# EAGLE board XBEE_NFC_shield_v0_2 (EAGLE 7.1.0)
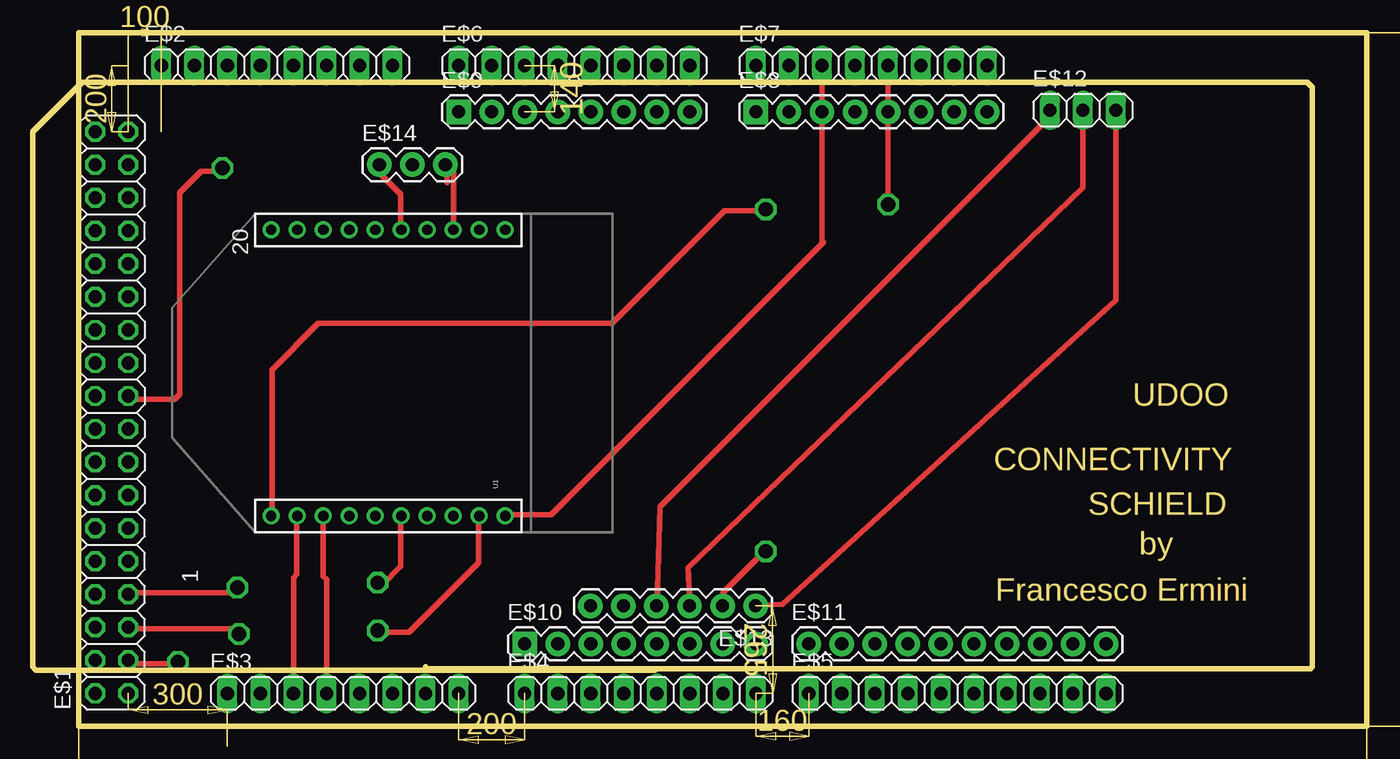
[diagram p0: board, top side]

Size 102.62 x 53.34 mm. Coordinates in mm from the lower left corner, seen from the top.
Outline: 30.23,4.57 30.35,4.45 98.3,4.45 98.42,4.57 98.42,49.15 98.04,49.53 3.81,49.53 0,45.72 0,4.57 0.25,4.32 47.88,4.32
Outline: 102.62,0 3.56,0 3.56,53.34 102.62,53.34 102.62,0
Copper layers (1*16): Top 0.035mm / dielectric 1.5mm / Bottom 0.035mm
Design rules "default": minimum track width 10mil, minimum drill 24mil, track to track 8mil, track to pad 8mil, pad to pad 8mil, via to via 8mil, smd to smd 8mil, copper to edge 40mil, drill to drill 8mil, minimum pad ring 10mil, minimum via ring 8mil, stop-mask expansion 4mil, vias tented up to drill 0mil, thermal gap 10mil
Net classes: 0 default: width 0.254 mm
Milling: area 5.8,45.7 to 6.4,47.2; area 5.8,49.3 to 6.4,50.8; area 4,46.3 to 5.7,50.2; area 7.4,53 to 8.9,53.6; area 8.4,53 to 9.9,53.6; area 6.7,53.7 to 10.6,55.4; area 7.4,1 to 8.9,1.6; area 13.5,1 to 15,1.6; area 9.2,1.7 to 13.1,3.3; area 32.8,-1.3 to 34.3,-0.7; area 36.3,-1.3 to 37.8,-0.7; area 33.3,-0.6 to 37.3,1.1; 15 more areas; 27 lines

## Footprints (pad centres in the part's own frame; a part is rotated, then mirrored left to right if it is on the bottom)
2X18 = drill 1.016 octagon: 1 -21.59,-1.27; 2 -21.59,1.27; 3 -19.05,-1.27; 4 -19.05,1.27; 5 -16.51,-1.27; 6 -16.51,1.27; 7 -13.97,-1.27; 8 -13.97,1.27; 9 -11.43,-1.27; 10 -11.43,1.27; 11 -8.89,-1.27; 12 -8.89,1.27; 13 -6.35,-1.27; 14 -6.35,1.27; 15 -3.81,-1.27; 16 -3.81,1.27; 17 -1.27,-1.27; 18 -1.27,1.27; 19 1.27,-1.27; 20 1.27,1.27; 21 3.81,-1.27; 22 3.81,1.27; 23 6.35,-1.27; 24 6.35,1.27; 25 8.89,-1.27; 26 8.89,1.27; 27 11.43,-1.27; 28 11.43,1.27; 29 13.97,-1.27; 30 13.97,1.27; 31 16.51,-1.27; 32 16.51,1.27; 33 19.05,-1.27; 34 19.05,1.27; 35 21.59,-1.27; 36 21.59,1.27
1X08 = drill 1.016 long: 1 -8.89,0; 2 -6.35,0; 3 -3.81,0; 4 -1.27,0; 5 1.27,0; 6 3.81,0; 7 6.35,0; 8 8.89,0
1X10 = drill 1.016 long: 1 -11.43,0; 2 -8.89,0; 3 -6.35,0; 4 -3.81,0; 5 -1.27,0; 6 1.27,0; 7 3.81,0; 8 6.35,0; 9 8.89,0; 10 11.43,0
1X08' = drill 1.016 pad 1.88 square: 1 0,0 | drill 1.016 pad 1.88: 2 2.54,0; 3 5.08,0; 4 7.62,0; 5 10.16,0; 6 12.7,0; 7 15.24,0; 8 17.78,0
1X10' = drill 1.016 pad 1.88: 1 0,0; 2 2.54,0; 3 5.08,0; 4 7.62,0; 5 10.16,0; 6 12.7,0; 7 15.24,0; 8 17.78,0; 9 20.32,0; 10 22.86,0
1X03 = drill 1.016 long: 1 -2.54,0; 2 0,0; 3 2.54,0
1X06 = drill 1.016 pad 1.88: 1 0,0; 2 2.54,0; 3 5.08,0; 4 7.62,0; 5 10.16,0; 6 12.7,0
1X03' = drill 1.016 pad 1.88: 1 0,0; 2 2.54,0; 3 5.08,0
XBEE-1 = drill 0.8: 1 -11,20; 2 -11,18; 3 -11,16; 4 -11,14; 5 -11,12; 6 -11,10; 7 -11,8; 8 -11,6; 9 -11,4; 10 -11,2; 11 11,2; 12 11,4; 13 11,6; 14 11,8; 15 11,10; 16 11,12; 17 11,14; 18 11,16; 19 11,18; 20 11,20

## Placement (x,y rotation side)
E$1  [2X18]  6.1,24.13 90 top
E$2  [1X08]  18.8,50.8 0 top
E$3  [1X08]  23.88,2.54 0 top
E$4  [1X08]  46.74,2.54 0 top
E$5  [1X10]  71.12,2.54 0 top
E$6  [1X08]  41.66,50.8 0 top
E$7  [1X08]  64.52,50.8 0 top
E$8  [1X08']  55.63,47.24 0 top
E$9  [1X08']  32.77,47.24 0 top
E$10  [1X08']  37.85,6.35 0 top
E$11  [1X10']  59.69,6.35 0 top
E$12  [1X03]  80.77,47.37 0 top
E$13  [1X06]  55.6,9.27 180 top
E$14  [1X03']  26.67,43.18 0 top
U1  XBEE  [XBEE-1]  38.35,27.18 90 top

## Library data of the parts
E$1-E$7 E$12 = pinhead
E$8-E$11 = SparkFun-Connectors
E$13 = SparkFun-Boards
E$14 = SparkFun-Capacitors
U1 = SparkFun

## Nets
S$4: E$7.5 E$8.5
S$5: E$7.3 E$8.3
S$6: E$3.3 U1.2
S$7: E$3.4 U1.3
S$8: E$12.1 E$13.4
S$9: E$12.2 E$13.3
S$10: E$12.3 E$13.1

## Tracks (layer width: path | path; a pad name or v marks a point on that pad's centre or on a via)
BO  (via drill 0.7 pad 0.3, 0.9 pad 0.3)
  other vias: 9.19,66.98 6.27,67.23
S$1
  Top 0.406: 18.41,16.26 18.41,27.43 21.97,30.99 44.58,30.99 53.21,39.62 56.26,39.62 56.39,39.62 | 56.52,39.62 56.39,39.62 | 56.39,39.62 56.52,39.75
S$3  (via drill 1.1 pad 0.81)
  other vias: 56.39,39.75
S$4  (via drill 1.1 pad 0.81)
  Top 0.406: E$7.5 E$8.5 v65.79,40.13
S$5
  Top 0.406: E$7.3 E$8.3 60.71,37.21
S$6
  Top 0.406: U1.2 20.32,16.14 20.32,11.68 20.07,11.43 E$3.3
S$7
  Top 0.406: U1.3 22.35,11.56 22.61,11.3 E$3.4
S$8
  Top 0.406: E$13.4 48.01,9.3 48.26,16.89 78.23,46.86 E$12.1
S$9
  Top 0.406: E$13.3 50.55,9.3 50.42,12.19 80.77,41.4 E$12.2
S$10
  Top 0.406: E$13.1 57.66,9.4 83.31,32.77 E$12.3
S$11  (via drill 1.1 pad 0.81)
  other vias: 56.39,13.46
S$12  (via drill 1.1 pad 0.81)
  other vias: 11.18,4.95
S$13
  Top 0.406: 7.49,4.83 11.3,4.83
S$14  (via drill 1.1 pad 0.81)
  other vias: 14.61,42.93
S$15  (via drill 1.1 pad 0.81)
  other vias: 15.88,7.11
S$16
  Top 0.406: 7.49,7.49 15.37,7.49 15.88,6.99
S$17
  Top 0.406: 53.09,9.14 53.09,10.29 56.01,13.21
S$18  (via drill 1.1 pad 0.81)
  Top 0.406: 7.49,10.29 15.37,10.29 v15.75,10.67
S$20
  Top 0.406: 28.32,37.97 28.45,37.85
S$21  (via drill 1.1 pad 0.81)
  other vias: 26.54,11.05
S$22  (via drill 1.1 pad 0.81)
  other vias: 26.54,7.37
S$23
  Top 0.406: 26.8,10.79 28.32,12.32 28.32,16.13 28.32,16.26 28.45,16.26
S$24
  Top 0.406: 26.54,7.24 28.96,7.24 34.29,12.57 34.29,16.38
S$25
  Top 0.406: 36.45,16.26 39.88,16.26 60.83,37.21
S$26
  Top 0.406: 32.38,38.35 32.38,42.8 31.88,43.31 31.88,41.78
S$27
  Top 0.406: 26.54,42.8 26.54,42.67 28.32,40.89 28.32,38.23
S$28
  Top 0.406: 14.61,43.05 14.22,42.67 12.95,42.67 11.3,41.02 11.3,39.12 11.3,37.47 11.3,25.53 10.92,25.15 7.37,25.15

## Text on the board
Dimension: UDOO | CONNECTIVITY | SCHIELD | by | Francesco Ermini
tPlace: 20 | 1
bNames: XBEE S1
tTest: SPI HEADER | 3.3V | GND | ADAFRUIT_NFC_SHIELD | CLK | CLK | MISO | SS | MOSI | SS